# Altium PCB Mixer_6mic_1lin.PcbDoc
Units mm, origin at the board's own origin, x right, y up, seen from the top; angles counter-clockwise.
Board outline 93.34 x 38.63 mm, 2 copper layers (Top Layer, Bottom Layer); 77 components, 36 nets, 168 pads, 99 vias.
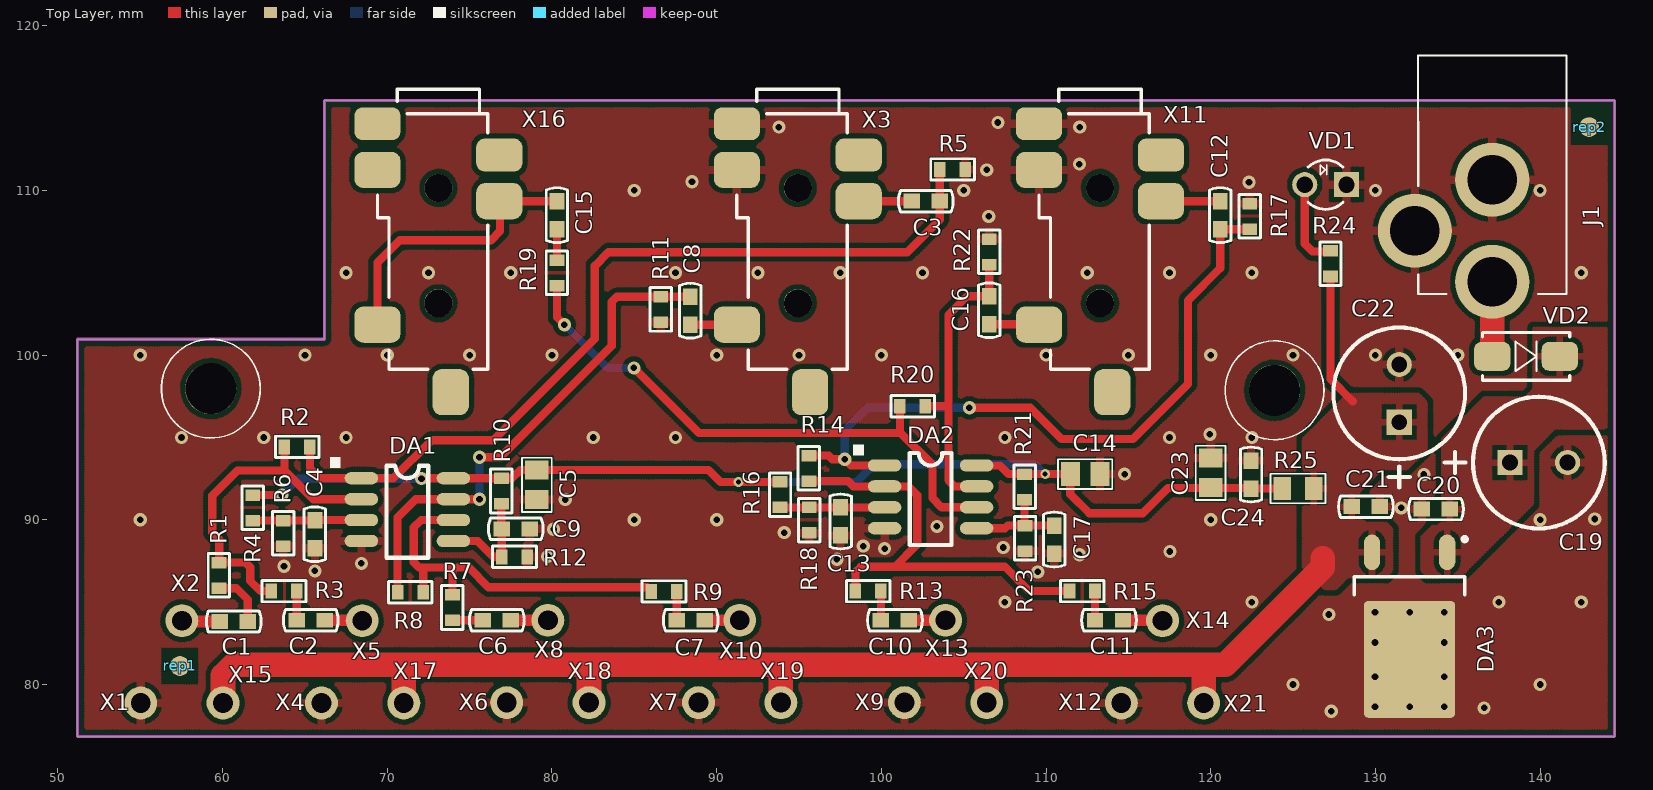
[diagram p0: Top Layer view]
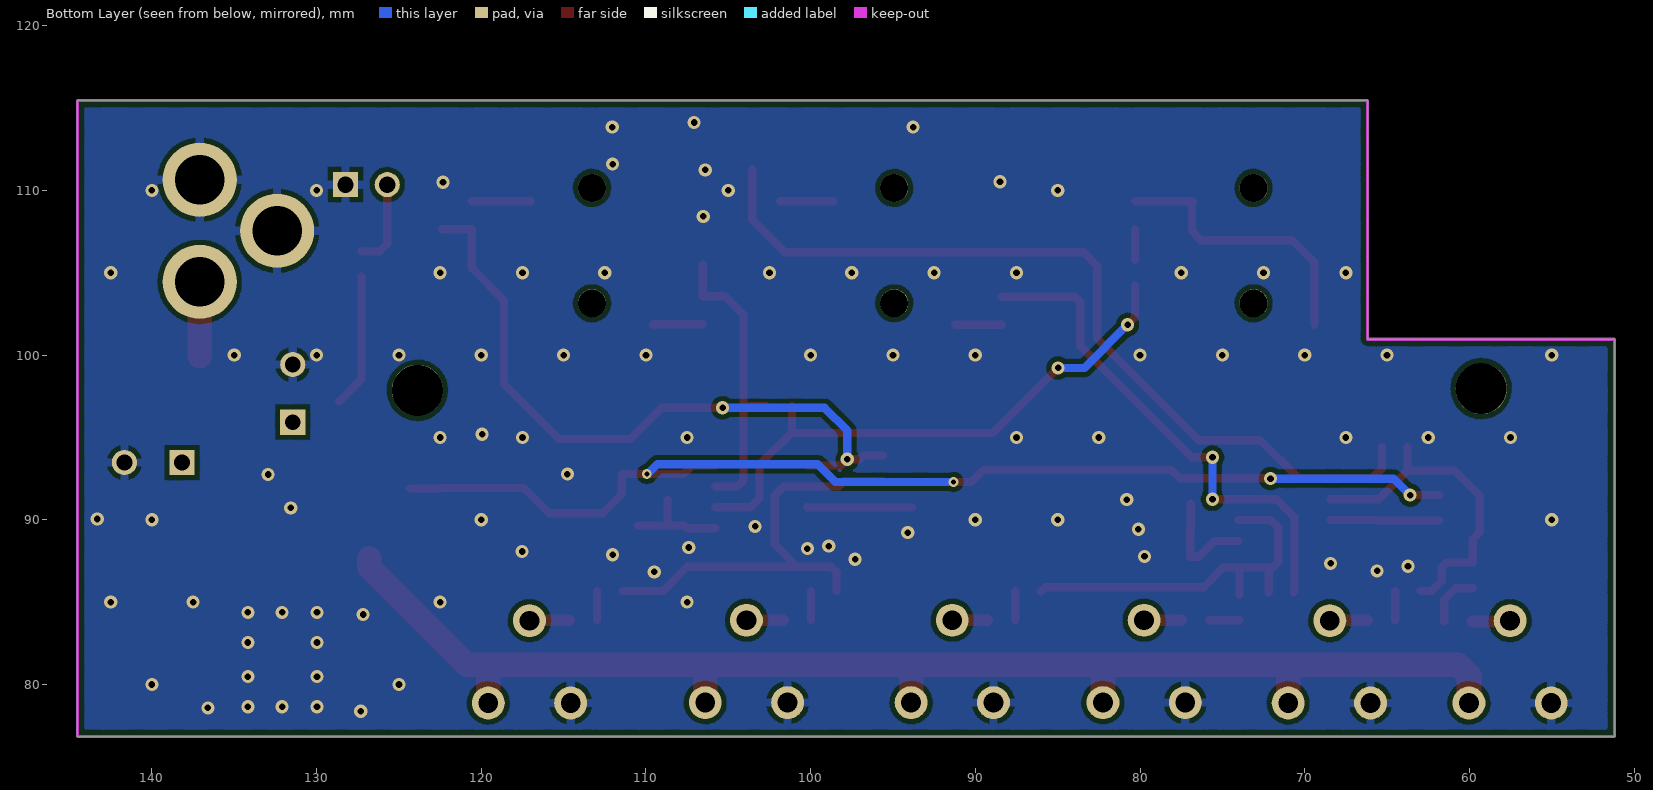
[diagram p1: Bottom Layer view, seen from below]

## Layer stack, top to bottom
Top Solder: solder mask 0.0102, Solder Resist, Dk 3.5
Top Layer: signal copper 0.0356
Dielectric 1: dielectric 0.32, FR-4, Dk 4.8
Bottom Layer: signal copper 0.0356
Bottom Solder: solder mask 0.0102, Solder Resist, Dk 3.5

## Board outline
51.181,76.84 51.181,100.965 66.181,100.965 66.181,115.465 144.526,115.465 144.526,76.84

## Design rules (kind name [scope] priority, off if disabled: settings)
Clearance [All] p1: gap=0.3
PolygonConnect PolygonConnect_1 [IsVia] p1: connectstyle=Direct reliefconductorwidth=0.254 reliefentries=4 polygonreliefangle="90 Angle" airgapwidth=0.254
PolygonConnect PolygonConnect_3 [InComponent('DA3') AND InNet('GND')] p2: connectstyle=Direct reliefconductorwidth=0.254 reliefentries=4 polygonreliefangle="90 Angle" airgapwidth=0.254
PolygonConnect PolygonConnect_2 [InNet('GND')] p3: connectstyle=Relief reliefconductorwidth=0.5 reliefentries=4 polygonreliefangle="90 Angle" airgapwidth=0.3
PolygonConnect [All] p4: connectstyle=Relief reliefconductorwidth=0.4 reliefentries=4 polygonreliefangle="90 Angle" airgapwidth=0.3
RoutingVias [All] p1: holewidth=0.4 width=0.8 viastyle="Through Hole" minholewidth=0.3 minwidth=0.6 maxholewidth=0.5 maxwidth=1
SolderMaskExpansion [All] p1: expansion=0.102
Width [All] p1: maxlimit=3 minlimit=0.2 preferedwidth=0.5
30 further rules are at their usual default settings.

## Classes and differential pairs
component class Power: C19 C20 C21 C22 C23 C24 DA3 J1 R24 R25 VD1 VD2
component class Main: C1 C2 C3 C4 C5 C6 C7 C8 C9 DA1 R1 R2 R3 R4 R5 R6 R7 R8 R9 R10 R11 R12 rep1 rep2
component class Main_line_in: C10 C11 C12 C13 C14 C15 C16 C17 DA2 R13 R14 R15 R16 R17 R18 R19 R20 R21 R22 R23
component class Connection: X1 X2 X3 X4 X5 X6 X7 X8 X9 X10 X11 X12 X13 X14 X15 X16 X17 X18 X19 X20 X21

## Components (designator, comment, footprint, x,y, rotation, side; value= is the part's Value field where it differs from the comment)
C1 "0.1uF" CC0603 60.675,83.825 r0 top
C2 "0.1uF" CC0603 65.35,83.9 r180 top
C3 "0.1uF" CC0603 102.7,109.35 r180 top
C4 "1uF" CC0603 65.6,89.125 r270 top
C5 "10uF" CC0805 79.075,92.125 r90 top
C6 "0.1uF" CC0603 76.65,83.9 r180 top
C7 "0.1uF" CC0603 88.425,83.9 r180 top
C8 "0.1uF" CC0603 88.4,102.7 r270 top
C9 "1uF" CC0603 77.8,89.45 r0 top
C10 "0.1uF" CC0603 100.825,83.9 r180 top
C11 "0.1uF" CC0603 113.825,83.9 r180 top
C12 "0.1uF" CC0603 120.575,108.5 r90 top
C13 "1uF" CC0603 97.525,89.9 r270 top
C14 "10uF" CC0805 112.375,92.775 r180 top
C15 "0.1uF" CC0603 80.3,108.5 r270 top
C16 "0.1uF" CC0603 106.55,102.725 r270 top
C17 "1uF" CC0603 110.5,88.8 r270 top
C19 "100uFx50V" CC8X3.5 138.175,93.475 r0 top
C20 "0.1uF" CC0603 133.675,90.65 r0 top
C21 "0.1uF" CC0603 129.425,90.8 r180 top
C22 "1000uFx10V" CC8X3.5 131.45,95.925 r90 top
C23 "10uF" CC0805 120,92.85 r270 top
C24 "0.1uF" CC0603 122.45,92.75 r270 top
DA1 "LM358D" SO-8 68.425,92.525 r270 top
DA2 "LM358D" SO-8 100.2,93.3 r270 top
DA3 "MC78M05CDTRK" D-PAK(TO-252AA) 132.075,83.525 r270 top
J1 "DCJ25" DCJ25 132.4,107.55 r270 top
R1 "10k" RC0603 59.775,86.625 r90 top
R2 "10k" RC0603 64.525,94.425 r0 top
R3 "10k" RC0603 63.725,85.675 r180 top
R4 "10k" RC0603 61.825,90.725 r270 top
R5 "10k" RC0603 104.325,111.275 r180 top
R6 "10k" RC0603 63.675,89.175 r270 top
R7 "10k" RC0603 73.95,84.675 r90 top
R8 "10k" RC0603 71.4,85.6 r180 top
R9 "10k" RC0603 86.8,85.65 r180 top
R10 "10k" RC0603 76.925,91.75 r270 top
R11 "10k" RC0603 86.6,102.775 r90 top
R12 "10k" RC0603 77.725,87.75 r0 top
R13 "10k" RC0603 99.2,85.675 r180 top
R14 "10k" RC0603 95.6,93.125 r90 top
R15 "10k" RC0603 112.2,85.675 r180 top
R16 "10k" RC0603 93.85,91.525 r270 top
R17 "10k" RC0603 122.375,108.425 r270 top
R18 "10k" RC0603 95.625,89.975 r270 top
R19 "10k" RC0603 80.3,105 r270 top
R20 "10k" RC0603 101.9,96.9 r0 top
R21 "18k" RC0603 108.7,92 r270 top
R22 "10k" RC0603 106.55,106.275 r270 top
R23 "10k" RC0603 108.725,88.875 r270 top
R24 "1k" RC0603 127.275,105.55 r90 top
R25 "10E" RC0805 125.3,91.9 r180 top
rep1 "REPER1.2" REPER1.2 57.4,81.125 r90 top
rep2 "REPER1.2" REPER1.2 142.975,113.85 r90 top
VD1 "GNL-3014SRC" LED3 128.25,110.35 r180 top
VD2 "S1M" SMA 139.15,99.925 r0 top
X1 "PIN_1mm" PIN_1mm 55.025,78.875 r0 top
X2 "PIN_1mm" PIN_1mm 57.525,83.875 r0 top
X3 "SJ-43516-SMT" SJ-43516-SMT 91.225,114.05 r270 top
X4 "PIN_1mm" PIN_1mm 66,78.875 r0 top
X5 "PIN_1mm" PIN_1mm 68.475,83.875 r0 top
X6 "PIN_1mm" PIN_1mm 77.25,78.9 r0 top
X7 "PIN_1mm" PIN_1mm 88.9,78.9 r0 top
X8 "PIN_1mm" PIN_1mm 79.75,83.9 r0 top
X9 "PIN_1mm" PIN_1mm 101.4,78.9 r0 top
X10 "PIN_1mm" PIN_1mm 91.4,83.9 r0 top
X11 "SJ-43516-SMT" SJ-43516-SMT 109.575,114.05 r270 top
X12 "PIN_1mm" PIN_1mm 114.575,78.875 r0 top
X13 "PIN_1mm" PIN_1mm 103.9,83.9 r0 top
X14 "PIN_1mm" PIN_1mm 117.075,83.875 r0 top
X15 "PIN_1mm" PIN_1mm 60.025,78.875 r0 top
X16 "SJ-43516-SMT" SJ-43516-SMT 69.4,114.05 r270 top
X17 "PIN_1mm" PIN_1mm 71,78.875 r0 top
X18 "PIN_1mm" PIN_1mm 82.25,78.9 r0 top
X19 "PIN_1mm" PIN_1mm 93.9,78.9 r0 top
X20 "PIN_1mm" PIN_1mm 106.4,78.9 r90 top
X21 "PIN_1mm" PIN_1mm 119.575,78.875 r0 top

## Footprints (in the part's own frame and the unit in brackets; to place one, negate y for a bottom-side part, rotate by r counter-clockwise, add the part's x,y. Pads: shape width x height; smd on the part's side, far side on the other; paste and mask are expansions set on the pad)
CC8X3.5 [mil]
  rect 60x60 hole 38: 1(0,0)
  round 60 hole 38: 2(137.8,0)
  silkscreen extent -156,-157 226,157
CC0603 [mm]
  rect 1x0.9 smd paste-25.4: 1(-0.85,0) 2(0.85,0)
  silkscreen extent -1.66,-0.65 1.66,0.65
CC0805 [mm]
  rect 1.15x1.45 smd paste-25.4: 1(-0.9,0) 2(0.9,0)
  silkscreen extent -1.65,-0.9 1.65,0.9
D-PAK(TO-252AA) [mm]
  oval 2.15x1 smd: 1(-4.5,2.28) 3(-4.5,-2.28)
  rrect10% 7.1x5.55 smd: 2(2,0)
  silkscreen extent -5.42,-3.35 -1.92,3.47
DCJ25 [mm]
  round 4.5 hole 3: 1(-3.1,4.7) 2(0,0) 3(3.1,4.7)
  silkscreen extent -10.65,0.2 3.84,9.2
LED3 [mil]
  rect 60x60 hole 39: 1(0,0)
  round 60 hole 39: 2(100,0)
  silkscreen extent 8,-59 92,59
PIN_1mm [mm]
  round 2 hole 1.2: 1(0,0)
RC0603 [mm]
  rect 0.7x0.9 smd paste-25.4: 1(-0.775,0) 2(0.774,0)
  silkscreen extent -1.32,-0.65 1.33,0.65
RC0805 [mm]
  rect 1.05x1.4 smd paste-25.4: 1(-0.95,0) 2(0.95,0)
  silkscreen extent -1.67,-0.89 1.67,0.89
REPER1.2 [mm]
  round 1.2 smd paste-25.4 mask-25.4: 1(0,0)
  Top Layer pour cut-out: -1.2,-1.2 1.2,-1.2 1.2,1.2 -1.2,1.2
SJ-43516-SMT [mm]
  rrect50% 2x2.8 smd: 1(0,0) 6(1.9,7.4)
  rrect50% 2.2x2.8 smd: 2(12.2,0) 3(4.7,7.4) 4(2.8,0)
  rrect50% 2.8x2.2 smd: 5(16.3,4.45)
  round 1.7 hole 1.7 unplated: 7(3.9,3.7) 8(10.9,3.7)
  silkscreen extent -2.1,0 14.9,6.7
SMA [mm]
  rrect50% 2.2x1.75 smd: 1(-2.05,0) 2(2.05,0)
  silkscreen extent -2.65,-1.45 2.65,1.45
SO-8 [mil]
  oval 29.53x80 smd: 1(0,0) 2(50,0) 3(100,0) 4(150,0) 5(150,220) 6(100,220) 7(50,220) 8(0,220)
  silkscreen extent -50,-75 190,160

## Part data
C1 C2 C3 C4 C6 C7 C8 C9 C10 C11 C12 C13 C15 C16 C17 C20 C21 C24: library part CC0603, "CC0603"
C5 C14 C23: library part CC0805, "CC0805"
C19 C22: library part CAP0.35, "CAP0.35"
R1 R2 R3 R4 R5 R6 R7 R8 R9 R10 R11 R12 R13 R14 R15 R16 R17 R18 R19 R20 R21 R22 R23 R24: library part RC0603, "RC0603"
R25: library part RC0805, "RC0805"
VD1: library part LED_3, "LED_3"
VD2: library part SS14, "Schottky Rectifier"
X3 X11 X16: "3.5mm connector 4 conductors"

## Free pads (board coordinates)
  round 3.1 hole 3.1 unplated: 0(59.281,97.965) 0(123.881,97.865)

## Via types
v1: diameter 0.8, hole 0.4, Top Layer to Bottom Layer, 97 vias
v2: diameter 0.6, hole 0.3, Top Layer to Bottom Layer, 2 vias

## Nets (pads, with @x,y where several pads share a name; then routed paths per layer and width w, separated by ;. In a path a pad name is that pad's centre, name@x,y a point inside that pad or via, vN(x,y) a via of type N, cw(c..) or ccw(c..) an arc to the next point about the centre after c; other vN are vias at no path point)
+5V: C5.2 C14.2 C23.2 C24.2 DA1.8 DA2.8 R4.1 R10.1 R16.1 R21.1 R25.2 | length 73.3
  Top Layer w0.5: R4.1 v1(63.6,91.5) ; v1(72.075,92.5) 72.1,92.525 DA1.8 R10.1 77.575,92.525 78.075,93.025 C5.2 89.5,93.025 90.225,92.3 v2(91.325,92.3) R16.1 ; DA2.8 107.2,93.3 107.725,92.775 R21.1 C14.2 111.475,91.55 112.625,90.4 115.875,90.4 117.4,91.925 120,91.925 122.425,91.925 C24.2 R25.2
  Bottom Layer w0.5: v1(63.6,91.5) 64.6,92.5 v1(72.075,92.5) ; v2(91.325,92.3) 98.5,92.3 99.575,93.375 109.3,93.375 v2@109.9,92.775
  other v2: 109.95,92.775
GND: C4.2 C5.1 C9.2 C13.2 C14.1 C17.2 C19.2 C20.1 C21.1 C22.2 C23.1 C24.1 DA1.4 DA2.4 DA3.2 J1.1 J1.2 R5.1 R6.2 R11.1 R12.2 R17.1 R18.2 R22.1 R23.2 VD1.1 X1.1 X3.1 X3.4 X4.1 X6.1 X7.1 X9.1 X11.1 X11.4 X12.1
  other v1: 127.325,78.375 136.6,78.575 129.975,78.65 132.1,78.65 134.175,78.65 125,80 140,80 129.975,80.475 134.175,80.475 129.975,82.55 134.175,82.55 127.175,84.25 129.975,84.375 132.1,84.375 134.175,84.375 107.5,85 122.5,85 137.5,85 142.5,85 109.5,86.838 65.6,86.9 63.725,87.175 68.425,87.35 97.3,87.6 79.725,87.775 112.025,87.875 117.525,88.075 100.2,88.25 107.4,88.32 98.9,88.4 94.1,89.225 80.1,89.425 103.375,89.6 55,90 85,90 90,90 120,90 140,90 143.325,90.05 131.575,90.725 80.8,91.225 132.95,92.75 114.775,92.775 57.5,95 62.5,95 67.5,95 82.5,95 87.5,95 107.5,95 117.5,95 122.5,95 119.95,95.2 55,100 65,100 70,100 75,100 80,100 90,100 95,100 100,100 110,100 115,100 120,100 125,100 130,100 135,100 67.5,105 72.5,105 77.5,105 87.5,105 92.5,105 97.5,105 102.5,105 112.5,105 117.5,105 122.5,105 142.5,105 106.525,108.425 85,110 105,110 130,110 140,110 122.325,110.5 88.5,110.525 106.4,111.25 112.025,111.6 93.775,113.85 112.05,113.85 107.075,114.125
NetC1_1: C1.1 X2.1 | length 2.4
  Top Layer w0.7: X2.1@57.5,83.9 X2.1 57.575,83.825 C1.1
NetC1_2: C1.2 R1.1 | length 3.4
  Top Layer w0.5: R1.1 60.825,85.85 61.525,85.15 C1.2
NetC2_1: C2.1 X5.1 | length 2.3
  Top Layer w0.7: C2.1 68.45,83.9 X5.1
NetC2_2: C2.2 R3.1 | length 1.8
  Top Layer w0.5: C2.2 R3.1
NetC3_1: C3.1 DA1.1 R2.2 R5.2 | length 52
  Top Layer w0.5: R2.2 65.299,93.126 65.9,92.525 DA1.1 70.375,92.525 72.675,94.825 76.425,94.825 82.6,101 82.6,105.425 83.425,106.25 101.575,106.25 103.55,108.225 C3.1 103.55,111.251 R5.2@103.526,111.275
NetC3_2: C3.2 X3.3 | length 3.2
  Top Layer w0.5: X3.3 C3.2
NetC4_1: C4.1 DA1.3 R4.2 R6.1 | length 6.6
  Top Layer w0.5: R4.2 R6.1@63.674,89.951 ; R6.1 65.575,89.95 C4.1 65.61,89.985 DA1.3
NetC6_1: C6.1 X8.1 | length 2.3
  Top Layer w0.7: C6.1 X8.1
NetC6_2: C6.2 R7.1 | length 1.9
  Top Layer w0.5: R7.1 C6.2
NetC7_1: C7.1 X10.1 | length 2.1
  Top Layer w0.7: C7.1 X10.1
NetC7_2: C7.2 R9.1 | length 1.8
  Top Layer w0.5: C7.2 R9.1@87.575,85.675
NetC8_1: C8.1 DA1.7 R8.2 R11.2 | length 31
  Top Layer w0.5: R8.2@70.676,85.6 70.625,85.651 70.625,90.15 71.73,91.255 DA1.7 75.595,91.255 v1(75.6,91.25) ; v1(75.6,93.8) 76.875,93.8 83.625,100.55 83.625,103.225 83.949,103.549 R11.2 C8.1@88.399,103.549
  Bottom Layer w0.5: v1(75.6,91.25) v1(75.6,93.8)
NetC8_2: C8.2 X3.2 | length 2.8
  Top Layer w0.5: C8.2 X3.2
NetC9_1: C9.1 DA1.5 R10.2 R12.1 | length 6.6
  Top Layer w0.5: DA1.5 75.485,88.715 76.45,87.75 R12.1 C9.1 76.925,89.475 R10.2
NetC10_1: C10.1 X13.1 | length 2.2
  Top Layer w0.7: C10.1 X13.1
NetC10_2: C10.2 R13.1 | length 1.8
  Top Layer w0.5: C10.2 R13.1
NetC11_1: C11.1 X14.1 | length 2.4
  Top Layer w0.7: C11.1 117.05,83.9 X14.1
NetC11_2: C11.2 R15.1 | length 1.8
  Top Layer w0.5: C11.2 R15.1
NetC12_1: C12.1 DA2.1 R14.2 R17.2 | length 42.2
  Top Layer w0.5: R14.2 96.801,93.899 97.025,93.675 v1(97.775,93.675) 98.15,93.3 DA2.1 ; v1(105.35,96.8) 109.05,96.8 110.95,94.9 115.275,94.9 118.625,98.25 118.625,103.325 120.575,105.275 C12.1 R17.2
  Bottom Layer w0.5: v1(97.775,93.675) 97.775,95.425 99.15,96.8 v1(105.35,96.8)
NetC12_2: C12.2 X11.3 | length 3.6
  Top Layer w0.5: X11.3 C12.2
NetC13_1: C13.1 DA2.3 R16.2 R18.1 | length 6.4
  Top Layer w0.5: R16.2 100.191,90.751 DA2.3
NetC15_1: C15.1 X16.2 X16.3 | length 17.4
  Top Layer w0.5: X16.2 69.4,105.625 70.75,106.975 76.3,106.975 76.85,107.525 76.85,109.3 X16.3 C15.1
NetC15_2: C15.2 R19.1 | length 1.9
  Top Layer w0.5: R19.1 C15.2
NetC16_1: C16.1 DA2.7 R20.2 R22.2 | length 18.2
  Top Layer w0.5: R20.2 104.05,96.9 104.075,96.875 ; DA2.7 104.445,92.03 104.075,92.4 104.075,96.875 ; R22.2 C16.1 105.2,103.575 104.075,102.45 104.075,96.875
NetC16_2: C16.2 X11.2 | length 3
  Top Layer w0.5: C16.2 109.55,101.875 X11.2
NetC17_1: C17.1 DA2.5 R21.2 R23.1 | length 6.4
  Top Layer w0.5: DA2.5 107.515,89.49 107.675,89.65 R23.1 ; R21.2 108.7,89.675 R23.1 ; C17.1 R23.1
NetC19_1: C19.1 C20.2 DA3.1 VD2.2
NetDA1_2: DA1.2 R1.2 R2.1 R3.2 | length 20.5
  Top Layer w0.5: R3.2 62.3,85.675 61.675,86.3 61.675,87.125 61.401,87.399 R1.2 59.8,87.424 59.8,88.8 59.375,89.225 59.375,91.475 60.9,93 63.75,93 ; R2.1 63.75,93 ; DA1.2 65.495,91.255 63.75,93
NetDA1_6: DA1.6 R7.2 R8.1 R9.2 | length 23.1
  Top Layer w0.5: R8.1 72.175,87.025 72.25,87.1 ; R7.2 73.95,87.1 ; DA1.6 72.06,89.985 71.6,89.525 71.6,87.425 71.925,87.1 72.25,87.1 ; R9.2@85.976,85.7 R9.2 85.776,85.9 76.15,85.9 74.95,87.1 73.95,87.1 ; 72.25,87.1 73.95,87.1
NetDA2_2: DA2.2 R13.2 R14.1 R15.2 | length 26.8
  Top Layer w0.5: R14.1 97.975,92.35 98.295,92.03 DA2.2 101.645,92.03 102.175,91.5 102.175,88.5 100.825,87.15 ; R13.2 98.426,86.774 98.4,86.8 98.75,87.15 100.825,87.15 ; R15.2 108.975,85.675 107.5,87.15 100.825,87.15
NetDA2_6: DA2.6 R19.2 R20.1 | length 35
  Top Layer w0.5: R19.2 80.3,102.3 v1(80.75,101.85) ; v1(84.975,99.225) 88.925,95.275 101.175,95.275 ; R20.1 101.125,95.325 101.175,95.275 ; DA2.6 103.665,90.76 103.1,91.325 103.1,93.35 101.175,95.275
  Bottom Layer w0.5: v1(80.75,101.85) 83.375,99.225 v1(84.975,99.225)
NetJ1_3: J1.3 VD2.1 | length 4.5
  Top Layer w1.5: VD2.1 J1.3
NetR24_2: R24.2 VD1.2 | length 5.4
  Top Layer w0.5: VD1.2 125.71,106.765 126.175,106.3 127.251,106.3 R24.2
VCC_MIC: C21.2 C22.1 DA3.3 R24.1 R25.1 X15.1 X17.1 X18.1 X19.1 X20.1 X21.1 | length 91.5
  Top Layer w0.5: R24.1 127.275,98.55 128.625,97.2
  Top Layer w1.5: X15.1 60.025,80.55 60.675,81.2 71.05,81.2 ; X17.1 71,81.15 71.05,81.2 ; X18.1 82.25,81.175 82.275,81.2 ; X19.1 93.9,81.175 93.875,81.2 ; X20.1 106.4,81.075 106.525,81.2 ; X21.1 119.575,81.075 119.7,81.2 ; 126.8,87.65 126.8,87.125 120.875,81.2 119.7,81.2 ; 71.05,81.2 82.275,81.2 ; 82.275,81.2 93.875,81.2 ; 93.875,81.2 106.525,81.2 ; 106.525,81.2 119.7,81.2
pads on no net: rep1.1 rep2.1 X3.5 X3.6 X3.7 X3.8 X11.5 X11.6 X11.7 X11.8 X16.1 X16.4 X16.5 X16.6 X16.7 X16.8

## Polygon pours and split planes (outlines as drawn)
GND on Top Layer "GND_L01_P004" (hatched 90Degree grid 0.15 track 0.2, remove dead copper, pour order 4): 66.181,115.465 144.526,115.465 144.526,76.84 51.181,76.84 51.181,100.965 66.181,100.965
NetC19_1 on Top Layer "NETC19_1_L01_P000" (hatched 90Degree grid 0.15 track 0.2, remove dead copper, pour order 0): 139.625,101.625 144.526,101.625 144.526,96.126 144.25,95.85 143.95,95.55 141.525,95.55 140.875,95.55 139.9,94.575 139.55,94.225 139.55,92.925 139.55,90.95 138.675,90.075 135.15,86.55 133.275,86.55 133.175,86.55 132.825,86.9 132.825,88.15 132.825,88.95 133.3,89.425 133.5,89.625 133.725,89.625 133.8,89.625 133.975,89.8 134.075,89.9 134.075,91.95 134.075,94.875 135.2,96 136.625,97.425 137.625,97.425 139.125,97.425 139.625,97.925
VCC_MIC on Top Layer "VCC_MIC_L01_P002" (hatched 90Degree grid 0.15 track 0.2, remove dead copper, pour order 2): 131,87.8 131,88.7 131,89.45 130.85,89.6 130.65,89.8 129.675,89.8 129.4,89.8 129.175,90.025 129,90.2 129,90.925 129,91.7 129.525,92.225 130.4,93.1 131.2,93.1 131.925,93.1 132.725,93.9 133.1,94.275 133.1,96.65 133.1,97.15 132.7,97.55 132.625,97.625 130.3,97.625 128.325,97.625 126.825,96.125 125.6,94.9 125.6,92.1 125.6,87.125 126.675,86.05 126.925,85.8 127.575,85.8 128.025,86.25 128.325,86.55 129,86.55 130.65,86.55 131,86.9
GND on Bottom Layer "GND_L02_P006" (hatched 90Degree grid 0.15 track 0.2, remove dead copper, pour order 6): 66.181,115.465 144.526,115.465 144.526,76.84 51.181,76.84 51.181,100.965 66.181,100.965

## Keep-outs
Keep-Out Layer:
  the board outline again, w0.2

## Silkscreen, mask and mechanical layers (free items; w line width, h text height)
Top Overlay:
  circle w0.1: c59.281,97.965 r3
  circle w0.1: c123.881,97.865 r3
Mechanical 3:
  rectangle: 104.231,59.04 105.356,60.24
  rectangle: 106.506,54.115 107.081,54.415
  rectangle: 106.181,54.415 107.281,56.415
  lines w0.1: 105.356,60.24 105.356,59.115 105.319,59.077 105.281,59.04 104.231,59.04 cw(c104.231,59.64) 104.231,60.24 105.356,60.24 ; 105.356,60.24 105.356,60.24
  lines w0.2: 104.456,59.64 106.756,59.64 106.756,58.815 106.756,53.94 ; 106.181,56.415 106.181,54.415 106.281,54.415 106.756,53.94 ; 107.281,56.44 107.281,54.415 106.806,53.94 106.756,53.94 ; 104.731,54.415 104.731,56.34 104.831,56.44 120.281,56.44 120.281,54.415 104.731,54.415
  text "Монтаж светодиодa VD1" at 101.45,63.375 h2

## Dimensions
104.831,56.44 to 106.756,59.64 on Mechanical 3
104.731,54.415 to 103.631,59.64 on Mechanical 3